# EAGLE board Apo Board 2017_large (EAGLE 7.6.0)
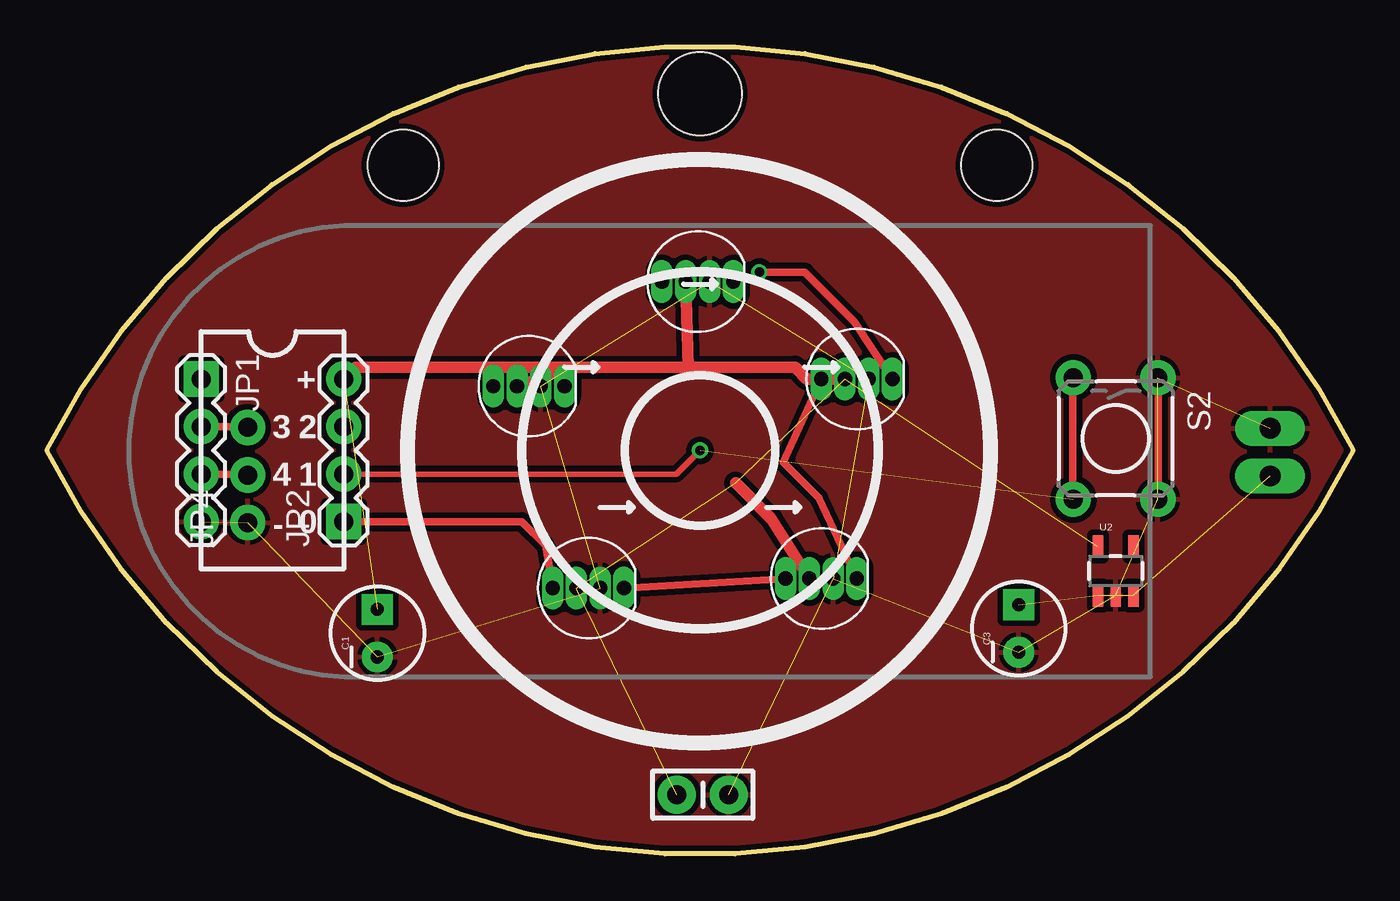
[diagram p0: board, top side]
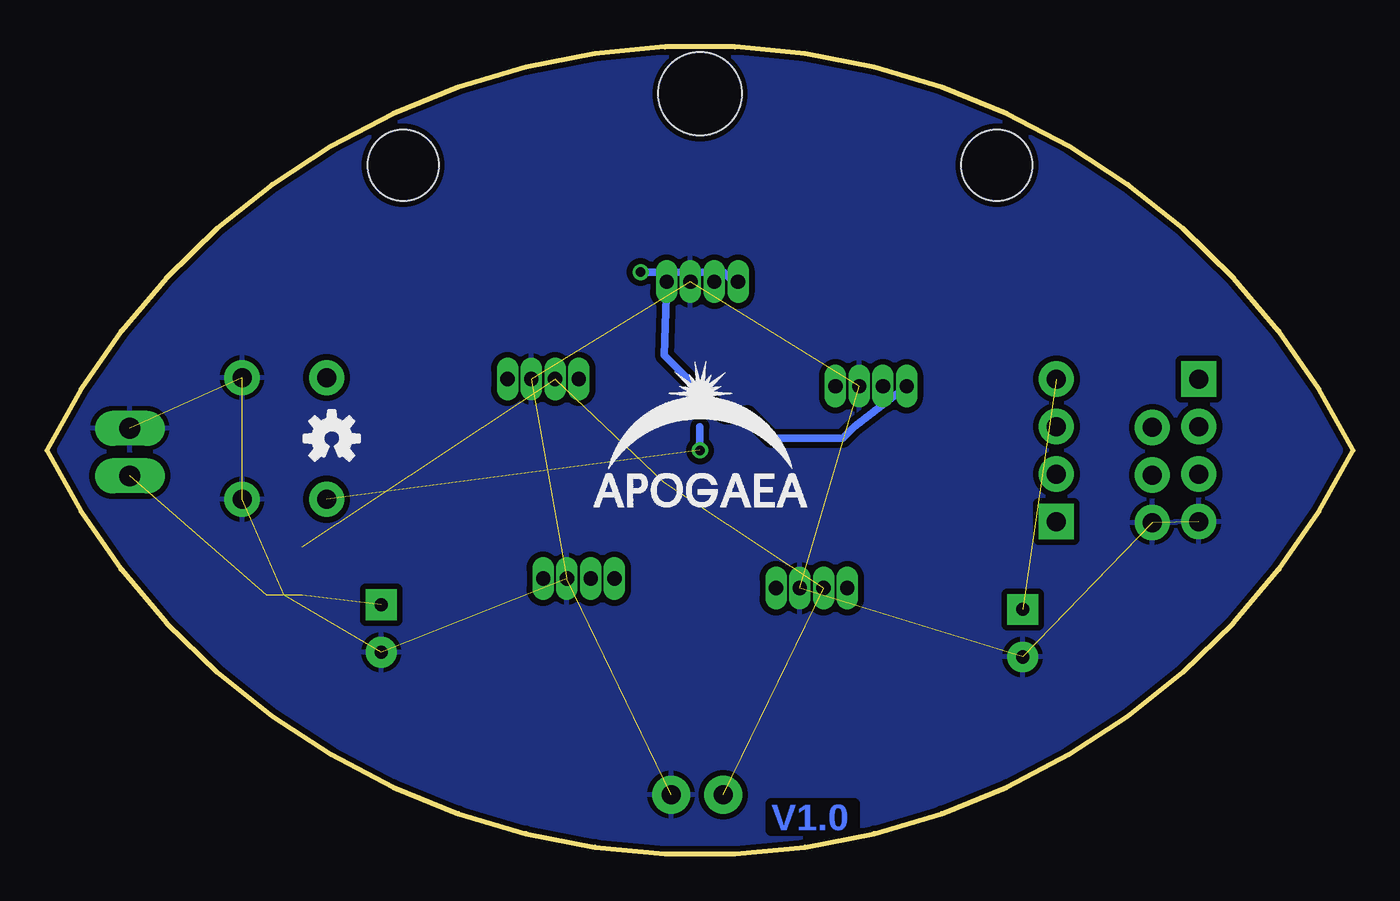
[diagram p1: board, bottom side, seen from below]

Size 69.85 x 43.15 mm. Coordinates in mm from the lower left corner, seen from the top.
Outline: 0,21.58 arc-127 69.85,21.58 arc-127 0,21.58
Copper layers (1*16): Top 0.035mm / dielectric 1.5mm / Bottom 0.035mm
Design rules "SparkFun-2-layer-TIGHT": minimum track width 7mil, minimum drill 15mil, track to track 7mil, track to pad 7mil, pad to pad 7mil, via to via 7mil, smd to smd 7mil, copper to edge 7mil, drill to drill 7mil, minimum pad ring 7mil, minimum via ring 7mil, stop-mask expansion 4mil, vias tented up to drill 25mil, thermal gap 10mil
Net classes: 0 Default: width 0.203 mm
Holes 4.45 mm at 34.93,40.62
Holes 3.81 mm at 19.05,36.81 50.8,36.81

## Footprints (pad centres in the part's own frame; a part is rotated, then mirrored left to right if it is on the bottom)
CAP-PTH-SMALL-KIT = drill 1.016 pad 2.032: 1 -1.397,0; 2 1.397,0
CPOL-RADIAL-10UF-25V = drill 0.7 pad 1.651 square: 1 1.27,0 | drill 0.7 pad 1.651: 2 -1.27,0
1X04 = drill 1.016 pad 1.88 square: 1 0,0 | drill 1.016 pad 1.88: 2 2.54,0; 3 5.08,0; 4 7.62,0
1X02_LONGPADS = drill 1.118 pad 1.88 long: 1 0,0; 2 2.54,0
1X03_NO_SILK = drill 1.016 pad 1.88: 1 0,0; 2 2.54,0; 3 5.08,0
TACTILE-PTH = drill 1.016 pad 1.88: 1 -3.251,2.261; 2 3.251,2.261; 3 -3.251,-2.261; 4 3.251,-2.261
SOT23-5 = smd 0.55 x 1.2: 1 -0.95,-1.3; 2 0,-1.3; 3 0.95,-1.3; 4 0.95,1.3; 5 -0.95,1.3
LED-RGB-THRU = drill 0.762 pad 0.889 long: 1 1.905,0; 2 0.635,0; 3 -0.635,0; 4 -1.905,0

## Placement (x,y rotation side)
0.1UF  [CAP-PTH-SMALL-KIT]  35.08,3.16 0 top
C1  [CPOL-RADIAL-10UF-25V]  17.68,11.8 90 top
C3  [CPOL-RADIAL-10UF-25V]  51.97,12.05 90 top
FRAME1  FRAME-LETTER  [CREATIVE_COMMONS]  18.14,-8.65 0 top  (outside the outline)
JP1  [1X04]  8.26,25.38 270 top
JP2  [1X04]  15.88,17.76 90 top
JP3  M02PTH3  [1X02_LONGPADS]  65.41,22.74 270 top
JP4  [1X03_NO_SILK]  10.74,17.71 90 top
LOGO1  OSHW-LOGOS  [OSHW-LOGO-S]  54.61,22.21 0 bottom
S2  [TACTILE-PTH]  57.15,22.21 270 top
U2  [SOT23-5]  57.15,15.12 0 top
U3  LED-TRICOLOR-5050-IC  [LED-RGB-THRU]  34.8,30.59 180 top
U4  LED-TRICOLOR-5050-IC  [LED-RGB-THRU]  25.78,25 180 top
U5  LED-TRICOLOR-5050-IC  [LED-RGB-THRU]  43.31,25.38 180 top
U6  LED-TRICOLOR-5050-IC  [LED-RGB-THRU]  41.4,14.72 180 top
U7  LED-TRICOLOR-5050-IC  [LED-RGB-THRU]  28.96,14.21 180 top

## Library data of the parts
0.1UF C1 C3 = SparkFun-Capacitors
FRAME1 LOGO1 = SparkFun-Aesthetics
JP1-JP4 = SparkFun-Connectors
S2 = SparkFun-Electromechanical
U2 = SparkFun-PowerIC; PROD_ID: VREG-00823
U3-U7 = SparkFun-LED

## Nets
2: JP1.2 JP4.3
3: JP1.3 JP4.2
GND: 0.1UF.2 C1.2 C3.2 JP1.4 JP3.1 JP4.1 S2.1 S2.2 U2.2 U3.3 U4.3 U5.3 U6.3 U7.3
MISO: JP2.2 S2.3 S2.4
MOSI: JP2.1 U7.1
N$1: U6.1 U7.4
N$2: U5.1 U6.4
N$5: U3.1 U5.4
N$6: U3.4 U4.1
RST: JP1.1
SCK: JP2.3
VCC: 0.1UF.1 C1.1 JP2.4 U2.5 U3.2 U4.2 U5.2 U6.2 U7.2
VREG: C3.1 JP3.2 U2.1 U2.3

## Tracks (layer width: path | path; a pad name or v marks a point on that pad's centre or on a via)
2
  Top 0.406: JP4.3 10.69,22.85 JP1.2
3
  Top 0.406: JP4.2 10.69,20.31 JP1.3
GND  (13 unrouted)
  pour Top (isolate 0.305): -3.81,45.7 72.39,45.07 71.75,-3.19 -4.45,-2.56
  pour Bottom (isolate 0.305): -3.81,47.61 75.56,46.97 74.93,-3.83 -4.45,-3.19
MISO  (via drill 0.51)  (1 unrouted)
  Top 0.254: S2.3 S2.4
  Top 0.305: v34.93,21.58 33.66,20.31 JP2.2
  Bottom 0.406: v34.93,21.58 34.93,22.85
MOSI
  Top 0.406: JP2.1 25.4,17.77 26.67,16.5 U7.1
N$1
  Top 0.406: U7.4 U6.1
N$2
  Top 0.406: U6.4 41.28,19.04 39.37,20.94 U5.1
N$5  (via drill 0.51)
  Top 0.406: U5.4 43.18,28.46 40.54,31.1 v38.1,31.1
  Bottom 0.406: v38.1,31.1 33.66,31.1 33.02,30.47 U3.1
N$6
  Bottom 0.406: U3.4 36.83,26.66 33.66,23.48 32.39,23.48 31.12,22.21 27.31,22.21 26.67,22.85 U4.1
VCC  (5 unrouted)
  Top 0.61: U5.2 40.64,25.39 40.01,26.02 34.29,26.02 | U4.2 27.94,26.02 | 27.94,26.02 16.51,26.02 JP2.4 | 27.94,26.02 34.29,26.02 | U3.2 34.29,26.02 | U6.2 38.74,17.92 36.82,19.83
VREG  (3 unrouted)

## Text on the board
Bottom: V1.0
tPlace: + | 3 | 2 | 4 | 1 | 0 | -
tDocu: + | 3 | 2 | 4 | 1 | - | 0